# Altium PCB somiqboard.PcbDoc (part 4 of 10)
Units mm, origin at the board's own origin, x right, y up, seen from the top; angles counter-clockwise.
Board outline 110 x 96 mm, 4 copper layers (Top Layer, Ground_Plane, Power_Plane, Bottom Layer), stack 1.454 mm thick; 221 components, 356 nets, 1185 pads, 539 vias.
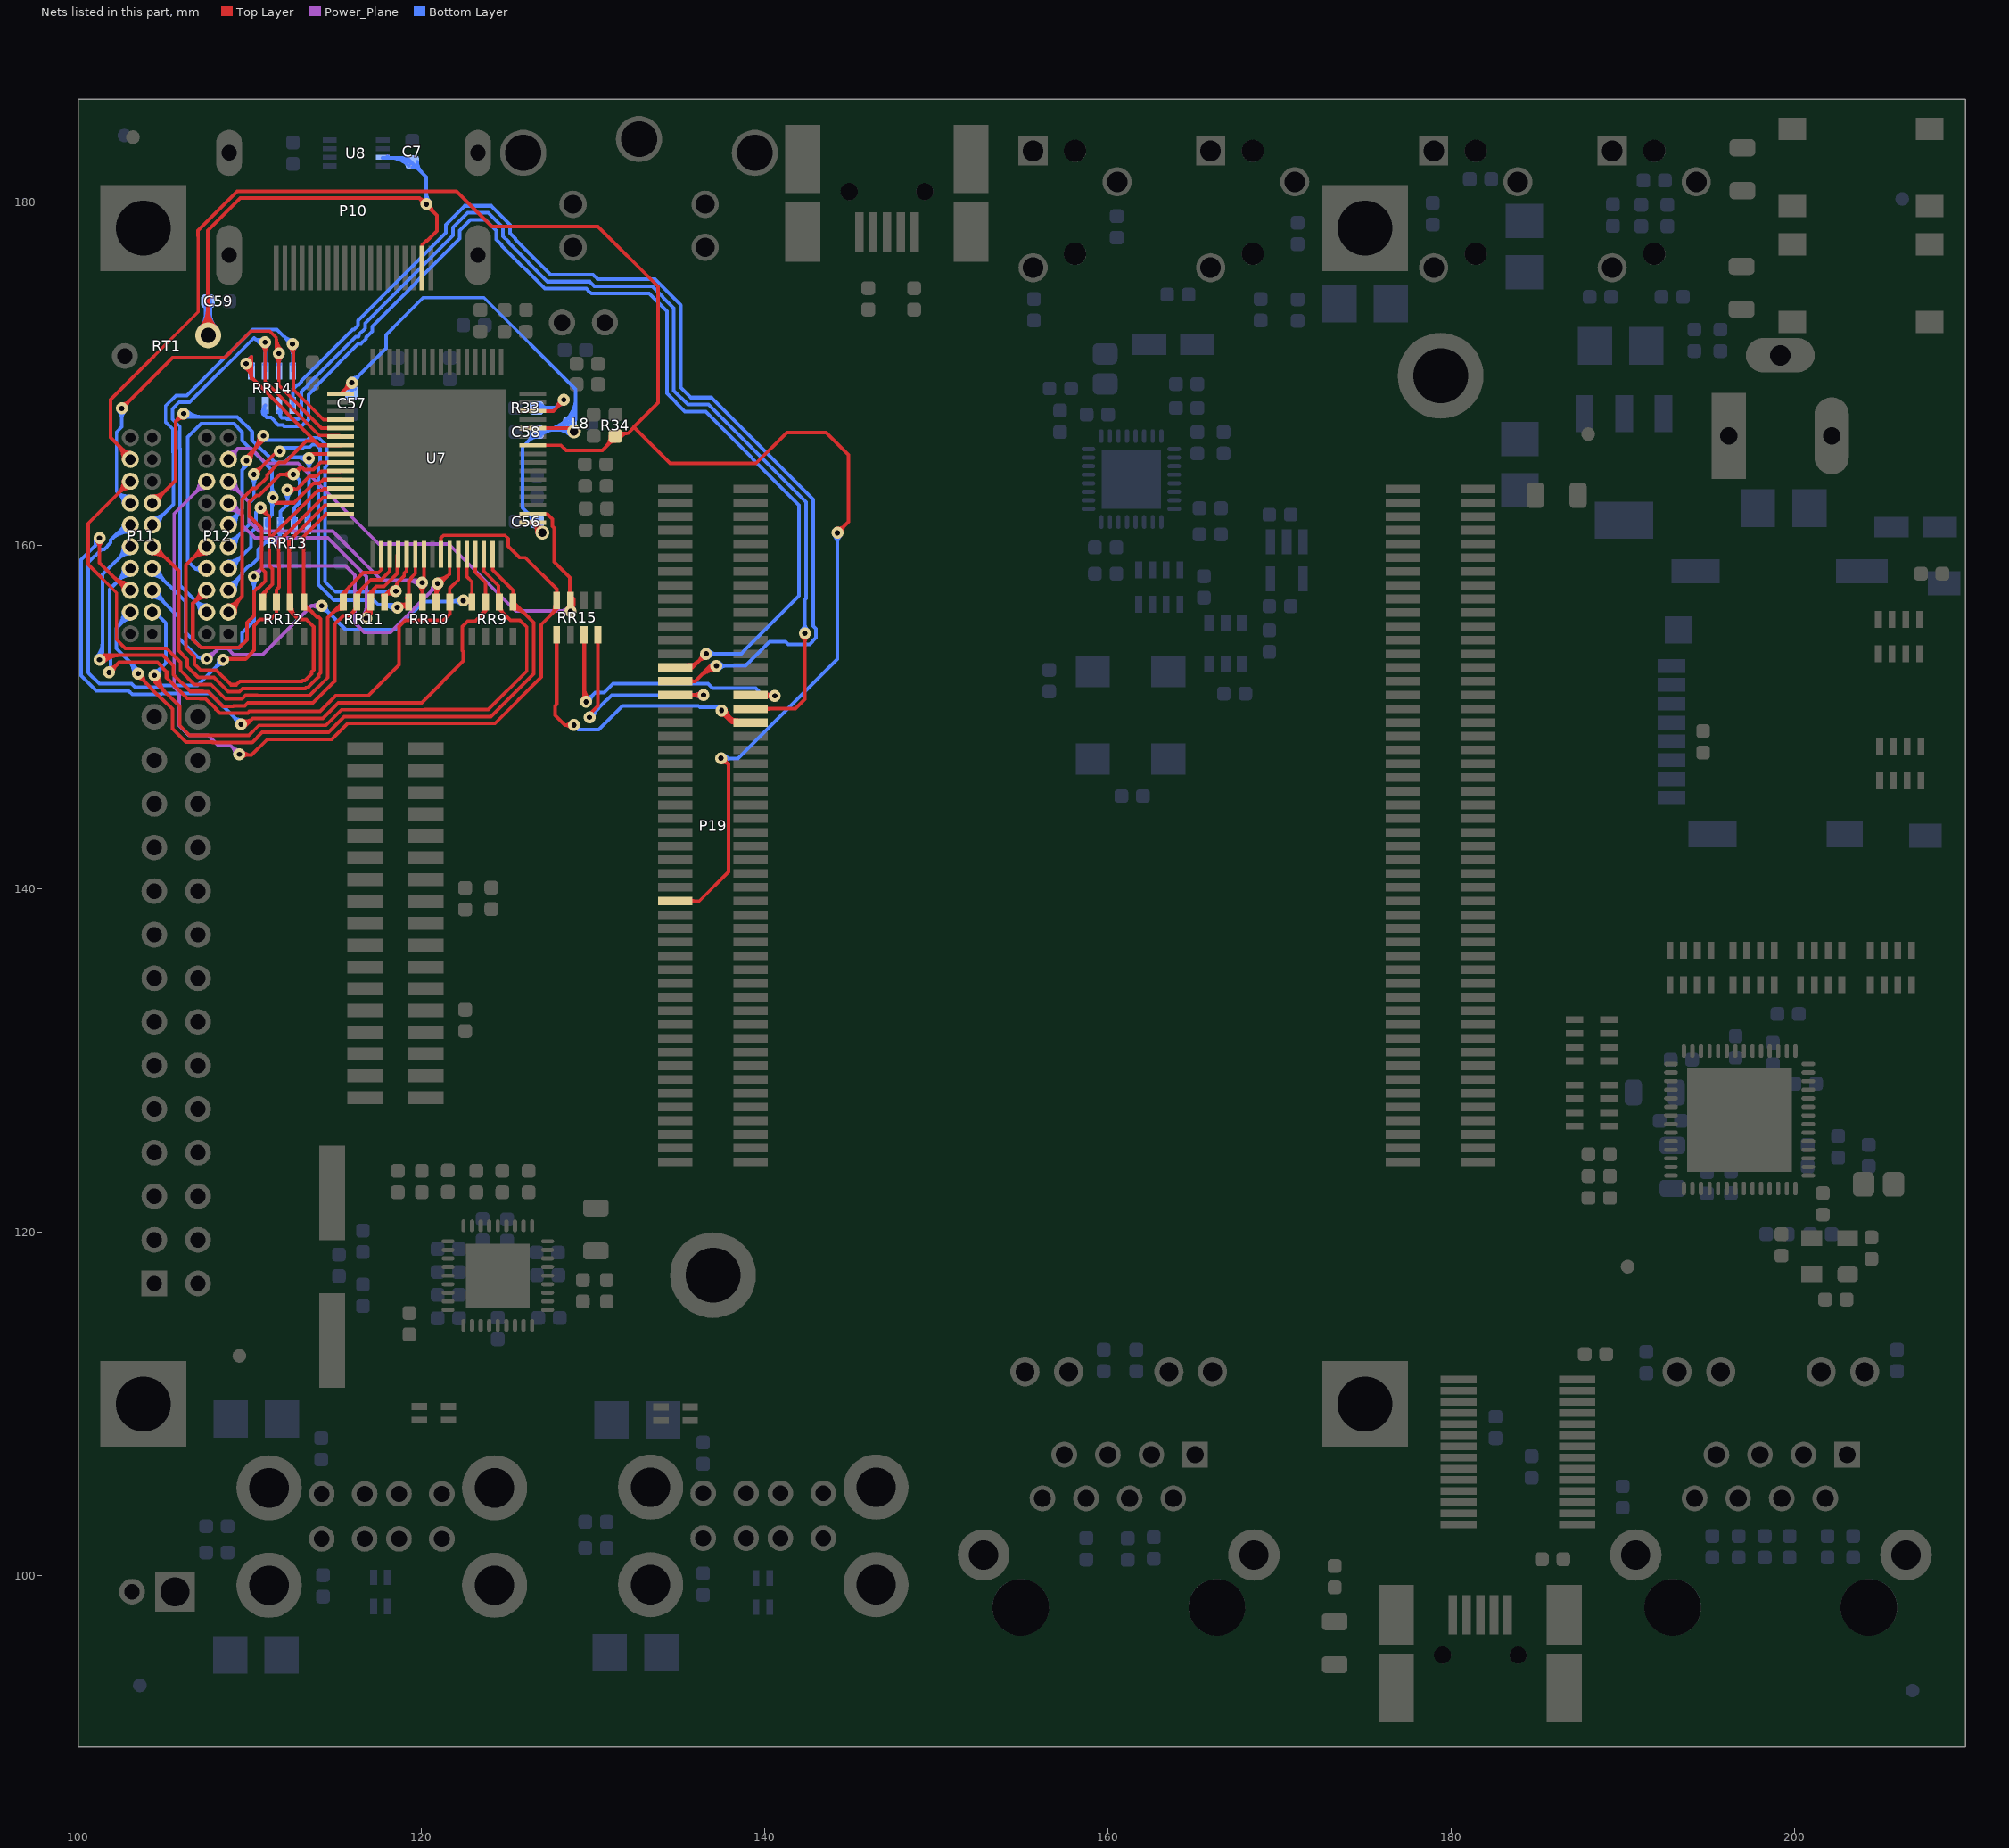
[diagram p6: the nets of this part, all layers, seen from the top]

## Via types
v1: diameter 0.7/0.7/0.7/0.7 (per signal layer), hole 0.3, Top Layer to Bottom Layer, tented both sides, 270 vias
v2: diameter 0.8, hole 0.3, Top Layer to Bottom Layer, tented both sides, 49 vias
v3: diameter 0.6/0.7/0.7/0.6 (per signal layer), hole 0.3, Top Layer to Bottom Layer, tented both sides, 47 vias
v4: diameter 0.6, hole 0.3, Top Layer to Bottom Layer, tented both sides, 43 vias
v5: diameter 1.1/1.1/1.1/1.1 (per signal layer), hole 0.6, Top Layer to Bottom Layer, tented both sides, 32 vias
v6: diameter 0.8/0.8/0.8/0.8 (per signal layer), hole 0.4, Top Layer to Bottom Layer, tented both sides, 31 vias
v7: diameter 0.9/0.9/0.9/0.9 (per signal layer), hole 0.5, Top Layer to Bottom Layer, tented both sides, 29 vias
v8: diameter 1.5/1.5/1.5/1.5 (per signal layer), hole 0.9, Top Layer to Bottom Layer, tented both sides, 14 vias
v9: diameter 1.2/1.2/1.2/1.2 (per signal layer), hole 0.6, Top Layer to Bottom Layer, tented both sides, 10 vias
v10: diameter 0.8/0.8/0.8/0.8 (per signal layer), hole 0.5, Top Layer to Bottom Layer, tented both sides, 6 vias
v11: diameter 1/1/1/1 (per signal layer), hole 0.5, Top Layer to Bottom Layer, tented both sides, 3 vias
v12: diameter 0.8/0.8/0.8/0.8 (per signal layer), hole 0.8, Top Layer to Bottom Layer, tented both sides, 2 vias
v13: diameter 1.2/1.2/1.2/1.2 (per signal layer), hole 1.2, Top Layer to Bottom Layer, tented both sides, 2 vias
v14: diameter 0.6/0.6/0.6/0.6 (per signal layer), hole 0.3, Top Layer to Bottom Layer, tented both sides, 1 vias

## Nets (pads, with @x,y where several pads share a name; then routed paths per layer and width w, separated by ;. In a path a pad name is that pad's centre, name@x,y a point inside that pad or via, vN(x,y) a via of type N, cw(c..) or ccw(c..) an arc to the next point about the centre after c; other vN are vias at no path point) (continued)
DSS_DATA21: P19.28 RR14.7 | length 66.4
  Top Layer w0.21: P19.28@134.8,152.9 135.8,152.9 v1(136.6,153.7) ; P19.28@135.55,152.835 ccw(c135.55,153.282) 135.866,152.966 ; P19.28@135.55,153.045 ccw(c135.55,153.999) 136.224,153.324 ; v1@136.355,153.7 cw(c135.764,153.7) 136.182,153.282 cw(c136.6,152.864) v1@136.6,153.455
  Bottom Layer w0.21: RR14.7@110.825,167.958 ccw(c111.004,167.792) 110.831,167.619 ; RR14.7@110.909,168.18 110.85,168.121 110.85,167.6 110.985,167.465 ; RR14.7@110.979,167.815 ccw(c111.164,167.644) 110.985,167.465 ; v1(136.6,153.7) 138.65,153.7 138.85,153.9 ; v1@136.773,153.527 cw(c137.191,153.109) 137.191,153.7 cw(c137.191,154.291) v1@136.773,153.873 ; 138.838,153.912 142,157.074 142,158.02 142.015,158.035 142.015,162.365 136.57,167.81 135.37,167.81 134.31,168.87 134.31,173.67 133.28,174.7 129.92,174.7 129.86,174.76 129.83,174.76 129.615,174.975 127.193,174.975 124.678,177.49 124.678,177.522 124.358,177.842 124.358,178.364 123.74,178.982 122.866,178.982 122.248,178.364 122.248,177.898 117.135,172.785 117.135,172.487 116.785,172.138 116.785,172.053 116.507,171.775 116.345,171.775 113.834,169.264 113.834,169.214 113.424,168.804 113.424,167.354 113.325,167.255 113.295,167.255 113.005,166.965 112.013,166.965 111.936,167.042 111.664,167.042 111.241,167.465 110.985,167.465
DSS_DATA22: P19.33 RR14.6 | length 65.4
  Top Layer w0.21: P19.33@139.25,150.5 141.8,150.5 142.35,151.05 v1(142.35,154.9) ; P19.33@140.053,150.397 cw(c140.3,150.15) 140.3,150.5 cw(c140.3,150.85) P19.33@140.053,150.603 ; v1@142.177,154.727 cw(c141.759,154.309) 142.35,154.309 cw(c142.941,154.309) v1@142.523,154.727
  Bottom Layer w0.21: RR14.6@111.655,167.802 cw(c111.458,167.518) 111.804,167.518 ; RR14.6@111.709,168.18 111.804,168.085 111.804,167.53 111.882,167.452 112.106,167.452 112.183,167.375 112.835,167.375 113.014,167.554 113.014,168.974 113.424,169.384 113.424,169.434 116.175,172.185 116.338,172.185 116.375,172.222 116.375,172.307 116.725,172.657 116.725,172.955 121.838,178.067 121.838,178.534 122.696,179.392 123.909,179.392 124.768,178.534 124.768,178.032 125.088,177.712 125.088,177.66 127.362,175.385 129.815,175.385 130.09,175.11 133.45,175.11 134.72,173.84 134.72,169.04 135.54,168.22 136.74,168.22 142.425,162.535 142.425,156.919 142.35,156.844 v1(142.35,154.9) ; v1@142.177,155.073 ccw(c141.759,155.491) 142.35,155.491 ccw(c142.941,155.491) v1@142.523,155.073
DSS_DATA23: P19.30 RR14.5 | length 68.6
  Top Layer w0.21: P19.30@134.745,152.045 P19.30@134.8,152.1 135.95,152.1 136.85,153 v1(137.2,153) ; P19.30@135.653,151.997 cw(c135.9,151.75) 135.9,152.1 cw(c135.9,152.45) P19.30@135.653,152.203 ; 136.184,152.334 cw(c137.2,151.318) v1@137.2,152.755 ; 136.542,152.692 cw(c137.2,152.035) v1@137.2,152.965
  Bottom Layer w0.21: RR14.5@112.442,168.547 ccw(c112.253,168.736) 112.52,168.736 ; RR14.5@112.509,168.18 112.509,167.995 112.52,168.006 112.52,169.109 112.786,169.375 112.835,169.375 113.014,169.554 113.014,169.603 116.006,172.595 116.083,172.595 116.315,172.827 116.315,173.124 121.428,178.237 121.428,178.704 122.526,179.802 124.079,179.802 125.178,178.704 125.178,178.202 125.498,177.882 125.498,177.83 127.532,175.795 130.005,175.795 130.28,175.52 133.619,175.52 135.13,174.009 135.13,169.209 135.709,168.63 136.909,168.63 142.85,162.689 142.85,155.326 143.005,155.171 143.005,154.629 142.621,154.245 141.381,154.245 141.221,154.405 140.305,154.405 138.9,153 v1(137.2,153) 137.05,153 136.95,153.1 v1@137.2,153.1 ; 112.52,168.683 ccw(c112.712,168.683) RR14.5@112.576,168.547 ; v1@137.373,152.826 cw(c137.791,152.408) 137.791,153 cw(c137.791,153.591) v1@137.373,153.173
DSS_HSYNC: P19.31 RR15.3 | length 22.2
  Top Layer w0.21: RR15.3@129.422,154.446 cw(c129.233,154.257) 129.5,154.257 ; v1@129.427,151.073 ccw(c129.25,151.25) 129.5,151.25 ; RR15.3@129.489,154.75 RR15.3@129.489,154.813 ; 129.5,151.733 ccw(c130.433,151.733) v1@129.773,151.073 ; 129.5,154.31 cw(c129.692,154.31) RR15.3@129.556,154.446 ; RR15.3@129.5,154.75 129.5,151 v1(129.6,150.9) ; P19.31@139.2,151.3 v1@140.6,151.3 ; P19.31@139.887,151.3 cw(c139.887,150.537) v1@140.426,151.076 ; P19.31@140.053,151.197 cw(c140.3,150.95) 140.3,151.3 cw(c140.3,151.65) P19.31@140.053,151.403 ; P19.31@140.13,151.3 ccw(c140.13,151.72) v1@140.426,151.423 ; v1@140.373,151.158 ccw(c140.096,151.046) 140.174,151.334 ccw(c140.234,151.561) v1@140.413,151.409
  Bottom Layer w0.21: v1(129.6,150.9) 130.134,151.434 130.659,151.434 131.18,151.955 136.721,151.955 136.976,151.7 139.48,151.7 139.88,151.3 v1@140.6,151.3 ; v1@129.6,151.145 ccw(c129.6,151.736) 130.018,151.318 ccw(c130.436,150.9) v1@129.845,150.9 ; 139.887,151.3 cw(c139.887,150.537) v1@140.426,151.076 ; 140.13,151.3 ccw(c140.13,151.72) v1@140.426,151.423
  other v1: 140.6,151.25
DSS_PCLK: P19.35 RR15.1 | length 22.7
  Top Layer w0.21: RR15.1@127.822,154.446 cw(c127.66,154.284) 127.889,154.284 cw(c128.118,154.284) RR15.1@127.956,154.446 ; RR15.1@127.889,154.813 127.889,150.765 127.795,150.671 127.795,150.128 128.373,149.55 ; v1@128.713,149.392 ccw(c128.373,149.106) 128.373,149.55 ; v1@128.713,149.708 cw(c128.373,149.994) 128.373,149.55 ; v1(128.9,149.55) 128.373,149.55 ; v1@137.45,150.35 138.099,149.7 ; v1@137.5,150.155 cw(c137.5,149.805) 137.747,150.052 ; v1@137.534,150.409 ccw(c138.019,150.535) 137.768,150.101 ; v1@137.604,150.195 ccw(c138.45,151.041) P19.35@138.45,149.845 ; v1@137.737,150.461 ccw(c138.701,150.712) P19.35@138.203,149.85 ; v1@137.745,150.4 ccw(c138.578,150.4) 137.989,149.811 ; 137.963,149.837 ccw(c138.45,150.324) P19.35@138.45,149.635 ; P19.35@138.347,149.597 ccw(c138.1,149.35) 138.1,149.7 ; P19.35@138.347,149.803 cw(c138.1,150.05) 138.1,149.7 ; P19.35@139.2,149.7 138.099,149.7
  Bottom Layer w0.21: v1(128.9,149.55) 129.155,149.295 130.345,149.295 131.1,150.05 131.725,150.675 136.149,150.675 136.179,150.645 136.205,150.645 136.25,150.6 137.35,150.6 v1@137.5,150.45
  other v1: 137.5,150.4
DSS_VSYNC: P19.32 RR15.4 | length 18
  Top Layer w0.21: v1(129.8,150) 129.75,149.95 129.7,150 129.7,150.073 130.289,150.663 RR15.4@130.289,154.813 ; RR15.4@130.222,154.446 cw(c130.06,154.284) 130.289,154.284 cw(c130.518,154.284) RR15.4@130.356,154.446 ; P19.32@134.8,151.3 v1(136.45,151.3) ; P19.32@135.653,151.197 cw(c135.9,150.95) 135.9,151.3 cw(c135.9,151.65) P19.32@135.653,151.403 ; v1@136.277,151.127 ccw(c135.859,150.709) 135.859,151.3 ccw(c135.859,151.891) v1@136.277,151.473
  Bottom Layer w0.21: v1(129.8,150) 129.75,149.95 129.7,150 129.7,150.073 129.873,150.073 130.824,151.024 130.828,151.024 131.104,151.3 v1(136.45,151.3) ; v1@129.8,150.245 ccw(c129.8,150.836) 130.218,150.418 ccw(c130.636,150) v1@130.045,150 ; v1@136.277,151.127 ccw(c135.859,150.709) 135.859,151.3 ccw(c135.859,151.891) v1@136.277,151.473
DVI_+5V: C7.2 C59.1 P10.18 RT1.2 U8.7 | length 42.7
  Top Layer w0.21: RT1.2@107.127,172.709 ccw(c106.105,173.731) 107.55,173.731 ; RT1.2@107.275,172.561 ccw(c106.612,173.224) 107.55,173.224 ; RT1.2@107.55,172.15 107.55,178.35 109.45,180.25 119.9,180.25 ; 107.55,173.383 ccw(c108.713,173.383) RT1.2@107.891,172.561 ; 107.55,173.89 ccw(c109.22,173.89) RT1.2@108.039,172.709 ; 119.917,180.233 cw(c119.584,179.9) v1@120.055,179.9 ; P10.18@120.053,176.167 120.053,177.539 120.286,177.772 120.352,177.772 120.905,178.325 120.905,179.245 119.9,180.25 ; v1@120.254,180.141 cw(c120.181,180.531) 119.9,180.25 ; v1@120.3,179.655 cw(c120.3,179.184) 120.633,179.517 ; v1@120.545,179.9 ccw(c121.257,179.9) 120.754,179.396
  Bottom Layer w0.21: U8.7@117.755,182.6 119.175,182.6 120.3,181.475 v1(120.3,179.9) ; U8.7@118.037,182.662 ccw(c118.186,182.811) 118.186,182.6 ; 118.159,182.6 cw(c118.159,181.034) C7.2@119.266,182.141 ; 118.666,182.6 cw(c118.666,181.541) C7.2@119.415,182.29 ; C7.2@119.475,182.055 cw(c119.475,181.464) 119.893,181.882 ; C7.2@119.77,182.35 ccw(c120.603,182.35) 120.014,181.761 ; v1@120.127,180.073 ccw(c119.709,180.491) 120.3,180.491 ccw(c120.891,180.491) v1@120.473,180.073
  Bottom Layer w0.5: RT1.2@107.229,172.607 ccw(c106.409,173.427) 107.569,173.427 ; RT1.2@107.569,172.331 C59.1@107.569,174.244 ; 107.569,173.494 ccw(c108.824,173.494) RT1.2@107.936,172.607
DVI_CLK+: P12.16 RR15.8 U7.57 | length 58
  Top Layer w0.2: v1(109.4,147.85) v1@109.5,147.85 ; v1@109.5,147.95 109.65,147.8 110.1,147.8 ; v1@109.577,147.673 cw(c109.883,147.367) 109.883,147.8 ; v1@109.581,148.022 ccw(c110.1,148.517) 110.1,147.8 ; U7.57@121.154,159.5 121.154,160.454 121.3,160.6 124.878,160.6 125.079,160.399 125.079,159.971 125.75,159.3 126.073,159.3 127.9,157.473 127.9,156.319 126.989,155.408 126.989,154.023 ; 127,154.012 127,152.35 124.29,149.64 120.535,149.64 120.53,149.635 115.683,149.635 114.773,148.725 111.025,148.725 110.1,147.8 ; 127.574,155.993 ccw(c127.053,156.513) RR15.8@127.789,156.513 ; RR15.8@127.818,157.184 ccw(c127.621,157.381) 127.9,157.381 ; 127.9,157.328 ccw(c128.104,157.328) RR15.8@127.96,157.184
  Power_Plane w0.2: 105.65,151.7 105.6,151.75 105.6,161.861 P12.16@107.493,163.754 ; 105.661,151.711 105.895,151.477 105.895,149.521 106.466,148.95 107.584,148.95 108.184,148.35 108.9,148.35 v1(109.4,147.85) ; P12.16@107.093,163.754 cw(c106.127,163.754) 106.81,163.071 cw(c107.493,162.388) P12.16@107.493,163.354 ; v1@109.15,147.85 ccw(c108.546,147.85) 108.973,148.277 ccw(c109.4,148.704) v1@109.4,148.1
DVI_DATA0: P11.4 RR9.1 U7.63 | length 44.8
  Top Layer w0.2: U7.63@124.154,159.5 124.154,158.596 125.35,157.4 RR9.1@125.35,157.2 ; RR9.1@125.278,157.089 ccw(c125.105,157.262) 125.35,157.262 ; 125.35,157.257 ccw(c125.588,157.257) RR9.1@125.42,157.089
  Top Layer w0.21: v1@103.5,152.305 cw(c103.5,151.955) 103.748,152.202 ; v1(103.5,152.55) 103.5,152.45 104.857,151.093 104.882,151.093 105.5,150.475 105.5,149.601 105.5,149.35 106.297,148.553 106.548,148.553 107.422,148.553 107.425,148.55 107.85,148.55 ; v1@103.745,152.55 ccw(c104.578,152.55) 103.989,151.961 ; 107.85,148.545 110.087,148.545 ; 110.087,148.545 110.145,148.545 110.73,149.13 114.605,149.13 115.515,150.04 120.362,150.04 120.367,150.045 124.068,150.045 126.555,152.532 126.555,154.95 ; RR9.1@125.349,156.323 cw(c125.349,155.369) 126.023,156.044 ; RR9.1@125.349,156.533 cw(c125.349,156.086) 125.665,156.402 ; RR9.1@125.349,156.718 126.55,155.517 126.55,154.95
  Bottom Layer w0.21: 102.281,155.235 ccw(c101.382,156.134) P11.4@102.653,156.134 ; 102.598,155.553 cw(c103.048,155.103) P11.4@103.048,155.739 ; 102.639,155.594 ccw(c102.099,156.134) P11.4@102.863,156.134 ; 102.94,153.31 cw(c102.181,152.55) v1@103.255,152.55 ; P11.4@103,156.15 103,155.954 102.243,155.197 102.243,154.007 103.5,152.75 v1(103.5,152.55) ; 103.299,152.951 cw(c102.898,152.55) v1@103.465,152.55
DVI_DATA1: P11.3 RR9.2 U7.62 | length 42
  Top Layer w0.2: v1@104.377,152.211 cw(c104.327,152.045) 104.5,152.045 cw(c104.76,152.045) v1@104.602,152.251 ; v1(104.45,152.45) 104.447,152.45 104.428,152.469 104.428,152.478 104.486,152.536 104.5,152.522 104.5,152.048 105.914,150.634 105.914,149.536 106.492,148.958 109.222,148.958 109.231,148.95 109.769,148.95 ; v1@104.5,152.45 ccw(c105.47,152.45) 104.784,151.764 ; v1@104.7,152.45 ccw(c106.153,152.45) 105.125,151.422 ; 109.769,148.95 109.95,148.95 110.535,149.535 114.438,149.535 115.348,150.445 120.194,150.445 120.199,150.45 123.9,150.45 126.15,152.7 126.15,154.777 126.145,154.782 126.145,155.255 125.75,155.65 125.2,155.65 124.549,156.301 RR9.2@124.549,156.718 ; U7.62@123.654,159.5 123.654,158.512 124.5,157.666 RR9.2@124.5,157.05 ; 124.5,157.378 ccw(c124.909,157.378) RR9.2@124.62,157.089 ; RR9.2@124.649,156.418 ccw(c125.173,156.418) 124.802,156.048
  Bottom Layer w0.2: P11.3@104.318,156.134 104.472,156.134 105.118,155.488 105.118,153.168 104.428,152.478 104.428,152.469 104.447,152.45 v1(104.45,152.45) ; v1@104.45,152.7 ccw(c104.45,153.182) 104.791,152.841 ; v1@104.7,152.45 cw(c105.424,152.45) 104.912,152.962
DVI_DATA2: P11.6 RR9.3 U7.61 | length 50
  Top Layer w0.2: U7.61@123.154,159.5 123.154,158.446 123.75,157.85 RR9.3@123.75,157.1 ; RR9.3@123.678,157.089 ccw(c123.505,157.262) 123.75,157.262 ; 123.75,157.257 ccw(c123.988,157.257) RR9.3@123.82,157.089
  Top Layer w0.21: v1@101.077,160.277 cw(c100.659,159.859) 101.25,159.859 cw(c101.841,159.859) v1@101.423,160.277 ; v1(101.25,160.45) 101.25,159 102.8,157.45 P11.6@103,157.45 ; 102.029,158.221 ccw(c103.048,159.24) P11.6@103.048,157.799 ; 102.387,157.863 ccw(c103.048,158.523) P11.6@103.048,157.589 ; 102.517,157.733 cw(c102.187,157.404) P11.6@102.653,157.404 ; v1@109.514,149.632 ccw(c109.677,150.014) 109.97,149.72 ; v1@109.596,149.825 ccw(c109.808,150.322) 110.19,149.94 ; v1@109.7,149.45 110.19,149.94 ; 122.4,153.876 122.4,155.3 122.7,155.6 123.15,155.6 123.749,156.199 ; 122.455,153.821 122.455,153.278 120.026,150.85 115.18,150.85 114.27,149.94 110.19,149.94 ; 123.432,155.882 ccw(c122.896,156.418) RR9.3@123.654,156.418 ; RR9.3@123.684,156.349 cw(c123.544,156.199) 123.749,156.199 ; RR9.3@123.749,156.718 123.749,156.199 ; RR9.3@123.814,156.349 ccw(c123.954,156.199) 123.749,156.199
  Bottom Layer w0.21: v1@101,160.3 101,160.006 100.185,159.191 100.185,152.435 101.065,151.555 102.063,151.555 102.937,151.555 102.991,151.5 103,151.5 ; 102.996,151.496 103.158,151.333 104.841,151.333 ; 104.908,151.4 107.7,151.4 v1@109.35,149.75 ; 109.081,150.019 cw(c108.662,149.6) v1@109.255,149.6 ; 109.082,150.018 ccw(c109.5,150.435) v1@109.5,149.845
  other v1: 109.5,149.6
DVI_DATA3: P11.5 RR9.4 U7.60 | length 33.6
  Top Layer w0.2: U7.60@122.654,159.5 122.654,158.196 122.95,157.9 122.95,157.25 ; RR9.4@122.878,157.089 ccw(c122.705,157.262) 122.95,157.262 ; RR9.4@122.881,157.091 ccw(c122.733,157.25) 122.95,157.25 ; 122.95,157.257 ccw(c123.188,157.257) RR9.4@123.02,157.089 ; RR9.4@123.018,157.09 cw(c123.171,157.25) 122.95,157.25
  Top Layer w0.21: v1(107.5,153.4) v1@107.549,153.4 ; v1(122.45,156.8) RR9.4@122.867,156.8 ; v1@122.522,156.8 cw(c122.522,156.291) RR9.4@122.882,156.651 ; v1@122.664,156.681 cw(c122.867,156.568) RR9.4@122.867,156.8 ; v1@122.664,156.919 ccw(c122.867,157.032) RR9.4@122.867,156.8 ; RR9.4@122.949,156.718 RR9.4@122.867,156.8
  Power_Plane w0.21: v1@107.5,153.645 ccw(c107.5,154.414) 108.044,153.87 ; v1@107.55,153.4 107.573,153.4 108.179,154.005 108.721,154.005 109.076,153.65 110.75,153.65 113.6,156.5 v1(114.2,156.5) ; v1@107.745,153.4 cw(c108.159,153.4) 107.866,153.692 ; v1@114.027,156.327 ccw(c113.609,155.909) 113.609,156.5 ccw(c113.609,157.091) v1@114.027,156.673
  Bottom Layer w0.21: P11.5@104.318,157.009 cw(c104.318,156.055) 104.992,156.73 cw(c105.667,157.404) P11.5@104.713,157.404 ; P11.5@104.318,157.404 105.85,155.872 105.85,154.65 107,153.5 ; 107.15,153.5 ccw(c107.15,153.75) v1@107.327,153.573 ; v1@107.271,153.313 ccw(c107,153.21) 107,153.5 ; v1(107.5,153.4) 107.4,153.5 107,153.5 ; v1@114.2,156.255 cw(c114.2,155.664) 114.618,156.082 cw(c115.036,156.5) v1@114.445,156.5 ; v1(114.2,156.5) 115.6,155.1 118.5,155.1 119.127,155.727 120.15,156.75 v1@122.4,156.75 ; 121.738,156.75 ccw(c121.738,157.512) v1@122.277,156.973 ; 121.979,156.75 cw(c121.979,156.329) v1@122.277,156.627
DVI_DATA4: P11.8 RR10.1 U7.59 | length 38.5
  Top Layer w0.2: RR10.1@121.595,157.089 ccw(c121.463,157.221) 121.65,157.221 ; RR10.1@121.65,156.95 121.65,157.5 122.154,158.004 U7.59@122.154,159.5 ; 121.65,157.298 ccw(c121.946,157.298) RR10.1@121.737,157.089
  Top Layer w0.21: v1@101.8,152.865 ccw(c101.8,153.504) 102.252,153.052 ; v1@101.85,152.65 102.4,153.2 103.224,153.2 103.229,153.205 104.621,153.205 105.155,152.671 105.155,152.315 106.37,151.1 107.1,151.1 107.107,151.093 107.422,151.093 108.04,150.475 108.04,150.455 108.255,150.24 109.214,150.24 109.228,150.255 109.886,150.255 109.981,150.35 114.1,150.35 115.01,151.26 116.91,151.26 118.695,153.045 118.695,155.278 119.067,155.65 121.3,155.65 121.666,156.016 RR10.1@121.666,156.718 ; v1@102.045,152.62 cw(c102.589,152.62) 102.204,153.004 ; RR10.1@121.599,156.351 cw(c121.437,156.189) 121.666,156.189 cw(c121.895,156.189) RR10.1@121.733,156.351
  Bottom Layer w0.21: v1@101.8,152.6 101.905,152.705 101.905,153.621 101.833,153.693 101.833,157.459 P11.8@103.048,158.674 ; P11.8@102.653,158.674 cw(c101.699,158.674) 102.374,158 cw(c103.048,157.325) P11.8@103.048,158.279
  other v1: 101.8,152.62
DVI_DATA5: P11.7 RR10.2 U7.58 | length 38.1
  Top Layer w0.2: v1@120.95,157.85 ccw(c120.95,158.333) 121.291,157.991 ; v1@120.95,158.05 ccw(c120.95,159.016) 121.633,158.333 ; v1@121.15,157.85 121.654,158.354 U7.58@121.654,159.5 ; v1@121.2,157.8 cw(c121.441,157.8) 121.271,157.971
  Top Layer w0.21: v1@120.777,157.627 cw(c120.561,157.411) 120.866,157.411 ; RR10.2@120.799,157.085 ccw(c120.637,157.247) 120.866,157.247 ccw(c121.095,157.247) RR10.2@120.933,157.085 ; RR10.2@120.866,156.718 120.866,157.716 v1(120.95,157.8) ; RR10.2@120.866,157.006 cw(c121.744,157.006) v1@121.123,157.627
  Power_Plane w0.21: v1(110.25,158.2) 110.15,158.1 110.15,158.2 110.2,158.2 110.821,158.821 115.587,158.821 116.129,158.28 116.129,155.497 116.676,154.95 118.2,154.95 120.95,157.7 v1(120.95,157.8) ; v1@110.25,158.445 ccw(c110.25,158.915) 110.583,158.583 ; v1@110.495,158.2 cw(c111.207,158.2) 110.703,158.703 ; 120.461,157.211 ccw(c119.872,157.8) v1@120.705,157.8 ; 120.702,157.452 cw(c120.95,157.205) v1@120.95,157.555
  Bottom Layer w0.2: 109.38,154.05 109.43,154.1 109.445,154.1
  Bottom Layer w0.21: P11.7@104.318,158.279 cw(c104.318,157.325) 104.992,158 cw(c105.667,158.674) P11.7@104.713,158.674 ; P11.7@104.318,158.674 106.26,156.732 106.26,154.959 107.16,154.059 108.555,154.059 108.564,154.05 109.38,154.05 ; 109.465,154.135 109.568,154.238 109.568,154.936 110.25,155.618 v1(110.25,158.2) ; v1@110.077,158.026 cw(c109.658,157.608) 110.25,157.608 cw(c110.841,157.608) v1@110.423,158.026
DVI_DATA6: P12.15 RR10.3 U7.55 | length 21.4
  Top Layer w0.2: v1@119.873,157.673 cw(c119.407,157.207) RR10.3@120.066,157.207 ; RR10.3@119.995,157.089 ccw(c119.825,157.259) 120.066,157.259 ccw(c120.307,157.259) RR10.3@120.137,157.089 ; RR10.3@120.05,156.65 RR10.3@120.05,156.718 ; RR10.3@120.066,156.718 v1@120.066,157.766 ; 120.066,157.285 cw(c120.614,157.285) v1@120.227,157.673 ; v1@120.154,158.004 U7.55@120.154,159.5
  Power_Plane w0.2: P12.15@108.763,163.354 cw(c108.763,162.388) 109.446,163.071 cw(c110.129,163.754) P12.15@109.163,163.754 ; P12.15@108.763,163.754 109.983,162.534 109.983,161.417 ; 110,161.4 110.545,160.855 114.826,160.855 117.681,158 118.244,158 118.247,158.003 118.785,158.003 118.788,158 120,158 v1@120.15,157.85 ; 119.083,158 cw(c119.083,156.883) v1@119.873,157.673 ; 119.566,158 cw(c119.566,157.366) v1@120.014,157.814 ; v1(120.05,157.85) v1@120.15,157.85 ; v1@120.2,157.85 v1@120.15,157.85
DVI_DATA7: P12.9 RR10.4 U7.54 | length 34.1
  Top Layer w0.2: v1@110.1,164 v1(110.25,164.15) 111.6,165.5 v1(111.75,165.5) ; v1@110.25,164.4 ccw(c110.25,165.004) 110.677,164.577 ccw(c111.104,164.15) v1@110.5,164.15 ; v1(118.606,156.4) 118.656,156.45 118.998,156.45 ; v1@118.628,156.445 ccw(c118.795,156.791) RR10.4@119.067,156.519 ; v1@118.715,156.625 ccw(c118.925,157.059) RR10.4@119.266,156.718 118.998,156.45 ; v1@118.808,156.547 ccw(c118.998,156.685) 118.998,156.45 ; v1@118.847,156.335 cw(c118.998,156.294) 118.998,156.45 ; v1@118.947,156.45 cw(c118.947,156.099) RR10.4@119.195,156.347 ; RR10.4@119.15,156.95 119.279,157.079 119.279,157.938 119.4,158.059 119.4,158.119 119.654,158.373 U7.54@119.654,159.5 ; RR10.4@119.187,156.357 ccw(c118.998,156.212) 118.998,156.45 ; RR10.4@119.195,157.089 ccw(c118.993,157.291) 119.279,157.291 ; 119.279,157.228 ccw(c119.476,157.228) RR10.4@119.337,157.089
  Bottom Layer w0.2: P12.9@108.7,159.95 109.963,161.213 109.963,162.462 110.25,162.749 v1(110.25,164.15) ; P12.9@108.763,160.344 ccw(c108.763,161.143) 109.328,160.578 ; P12.9@108.963,159.944 cw(c109.612,159.944) 109.153,160.403 ; P12.9@109.163,159.944 cw(c110.295,159.944) 109.495,160.745 ; v1@110.073,163.973 cw(c109.646,163.546) 110.25,163.546 cw(c110.854,163.546) v1@110.427,163.973 ; v1(111.75,165.5) 111.75,165.6 111.85,165.7 113.131,165.7 113.181,165.75 113.508,165.75 113.649,165.891 113.868,165.891 114.1,165.659 114.1,164.83 114,164.731 114,157.734 114.906,156.828 117.223,156.828 117.496,156.555 118.451,156.555 v1(118.606,156.4) ; 117.627,156.555 cw(c117.627,155.421) v1@118.429,156.223 ; 118.11,156.555 cw(c118.11,155.904) v1@118.571,156.364
DVI_DATA8: P12.11 RR11.1 U7.53 | length 34.2
  Top Layer w0.2: v1(109.813,164.954) 109.813,165.163 110.8,166.15 v1(110.8,166.4) ; v1@109.863,164.954 cw(c110.488,164.954) 110.046,165.396 ; v1@110.063,164.954 cw(c111.171,164.954) 110.388,165.738 ; 110.196,165.546 ccw(c109.343,166.4) v1@110.55,166.4 ; 110.538,165.888 ccw(c110.026,166.4) v1@110.75,166.4 ; RR11.1@117.75,157.1 RR11.1@117.875,157.1 ; RR11.1@117.956,157.018 cw(c118.349,157.018) 118.071,157.296 ; 118.046,157.271 cw(c118.292,157.025) v1@118.488,157.312 ; v1@118.322,157.547 RR11.1@117.875,157.1 ; v1@118.375,157.147 ccw(c118.153,156.822) RR11.1@117.875,157.1 ; v1@118.43,157.588 ccw(c118.349,157.812) 118.587,157.812 ; v1@118.587,157.387 118.587,157.812 ; 118.587,157.785 ccw(c118.948,157.785) v1@118.693,157.53 ; U7.53@119.154,159.5 119.154,158.544 119,158.39 119,158.225 118.587,157.812
  Bottom Layer w0.2: P12.11@108.75,161.15 108.75,161.34 109.563,162.153 109.563,164.413 ; P12.11@108.763,161.614 ccw(c108.763,162.245) 109.209,161.799 ; P12.11@108.963,161.214 cw(c109.781,161.214) 109.202,161.792 ; P12.11@109.163,161.214 cw(c110.463,161.214) 109.544,162.133 ; v1@109.604,164.817 cw(c109.336,164.64) 109.563,164.413 ; 109.737,164.587 ccw(c109.545,164.778) v1@109.771,164.927 ; v1@109.767,165 v1(109.813,164.954) 109.813,164.663 109.563,164.413 ; v1@110.8,166.15 113.343,166.15 113.484,166.291 114.034,166.291 114.5,165.825 114.5,164.665 114.4,164.565 114.4,157.9 115,157.3 v1@118.5,157.3 ; 117.783,157.3 ccw(c117.783,158.086) v1@118.339,157.53 ; 118.042,157.3 cw(c118.042,156.879) v1@118.339,157.176
  other v1: 118.516,157.353
DVI_DATA9: P12.13 RR11.2 U7.52 | length 22.6
  Top Layer w0.2: RR11.2@116.95,157 116.95,157.19 117.385,157.625 ; RR11.2@116.956,157.012 cw(c117.344,157.035) 117.069,157.31 ; RR11.2@117.156,157.024 cw(c117.94,157.069) 117.385,157.625 ; 118.6,158.659 cw(c118.845,158.659) U7.52@118.672,158.832 ; U7.52@118.654,159.5 118.6,159.446 118.6,158.39 117.834,157.625 117.385,157.625
  Top Layer w0.21: v1@116.651,155.974 ccw(c116.17,156.718) RR11.2@117.056,156.718 117.056,156.056 ; v1@116.765,155.797 ccw(c116.419,156.332) RR11.2@117.056,156.332 ; RR11.2@116.989,156.351 cw(c116.827,156.189) 117.056,156.189 cw(c117.285,156.189) RR11.2@117.123,156.351
  Power_Plane w0.21: P12.13@108.769,162.299 cw(c108.789,161.669) 109.235,162.115 ; P12.13@108.776,162.089 cw(c108.811,161.005) 109.578,161.772 ; P12.13@108.85,162.5 109.578,161.772 ; P12.13@109.158,162.484 ccw(c109.863,162.484) 109.364,161.986 ; v1@116.611,155.941 ccw(c116.153,156.399) 116.8,156.399 ; v1(116.784,155.768) v1(116.784,155.768) ; v1@116.8,155.75 116.8,158.2 114.55,160.45 110.3,160.45 109.578,161.172 109.578,161.772 ; 116.8,156.32 ccw(c117.336,156.32) v1@116.957,155.941
DVI_DATA10: P11.10 RR11.3 U7.51 | length 38.5
  Top Layer w0.2: RR11.3@116.256,156.972 116.256,157.211 117.07,158.025 117.669,158.025 118.15,158.506 118.15,159.496 U7.51@118.154,159.5 ; RR11.3@116.356,157.018 cw(c117.062,157.018) 116.563,157.517
  Top Layer w0.21: v1@101.275,153.325 cw(c101.975,152.625) 101.975,153.615 ; v1@101.295,153.305 v1(101.25,153.35) 101.515,153.615 ; v1@101.339,153.578 ccw(c101.399,153.731) 101.515,153.615 ; v1@101.423,153.176 cw(c102.482,152.118) 102.482,153.615 ; v1@101.478,153.439 cw(c101.631,153.499) 101.515,153.615 ; 116.072,156.202 ccw(c115.856,156.418) RR11.3@116.161,156.418 ; RR11.3@116.256,156.718 116.3,156.674 116.3,156.431 115.782,155.913 115.451,155.913 114.95,155.412 114.95,152.1 113.7,150.85 109.902,150.85 109.716,150.665 109.059,150.665 109.044,150.65 108.445,150.65 107.592,151.503 107.277,151.503 107.27,151.51 107.2,151.51 106.54,151.51 105.565,152.485 105.565,152.991 104.941,153.615 101.515,153.615
  Bottom Layer w0.21: v1@101.077,153.523 ccw(c100.24,154.359) 101.423,154.359 ; v1@101.225,153.374 ccw(c100.747,153.852) 101.423,153.852 ; v1@101.423,153.35 101.423,158.319 P11.10@103.004,159.9 ; P11.10@102.653,159.944 cw(c101.699,159.944) 102.374,159.27 cw(c103.048,158.595) P11.10@103.048,159.549 ; P11.10@103.048,159.944 P11.10@103.004,159.9 ; P11.10@103.05,159.9 P11.10@103.004,159.9
DVI_DATA11: P11.16 RR11.4 U7.50 | length 37.7
  Top Layer w0.2: P11.16@102.648,163.754 cw(c101.682,163.754) 102.365,163.071 cw(c103.048,162.388) P11.16@103.048,163.354 ; P11.16@103.048,163.754 100.6,161.306 100.6,158.9 102.248,157.252 102.248,154.533 102.761,154.02 105.153,154.02 105.97,153.203 105.97,152.73 106.785,151.915 107.753,151.915 108.583,151.085 109.564,151.085 109.759,151.28 110.457,151.28 110.482,151.255 113.484,151.255 114.545,152.316 114.545,155.807 RR11.4@115.456,156.718 ; 114.773,156.035 cw(c115.456,155.352) RR11.4@115.456,156.318 ; 115.115,156.377 cw(c115.456,156.035) RR11.4@115.456,156.518 ; RR11.4@115.356,157.018 cw(c115.689,157.018) 115.454,157.254 ; RR11.4@115.4,157 115.4,157.2 116.625,158.425 117.503,158.425 117.654,158.576 U7.50@117.654,159.5 ; RR11.4@115.556,157.018 cw(c116.372,157.018) 115.795,157.595
DVI_DATA12: P11.9 RR12.1 U7.47 | length 31.4
  Top Layer w0.21: P11.9@104.318,159.549 cw(c104.318,158.262) 105.228,159.172 ; P11.9@104.318,159.759 cw(c104.318,158.979) 104.869,159.531 ; P11.9@104.35,160.05 105.868,158.532 105.868,153.878 106.375,153.371 106.375,152.945 107,152.32 107.92,152.32 108.75,151.49 108.806,151.49 109.396,151.49 109.596,151.69 113.24,151.69 113.285,151.735 113.391,151.735 114.015,152.359 114.015,152.465 114.14,152.59 114.14,155.735 114.03,155.845 113.929,155.845 113.157,156.617 RR12.1@113.157,156.718 ; P11.9@104.713,159.944 ccw(c105.333,159.944) 104.895,159.505 ; RR12.1@113.09,157.085 ccw(c112.945,157.23) 113.15,157.23 ; RR12.1@113.15,156.718 113.15,160.527 114.473,161.85 U7.47@115.35,161.85 ; 113.15,157.264 ccw(c113.403,157.264) RR12.1@113.224,157.085 ; RR12.1@113.157,156.323 cw(c113.157,155.614) 113.658,156.115 ; 114.31,161.688 cw(c114.654,161.344) U7.47@114.654,161.83
DVI_DATA13: P12.10 RR12.2 U7.46 | length 31.2
  Top Layer w0.21: 106.564,159.164 cw(c107.493,158.236) P12.10@107.493,159.549 ; 106.923,159.523 cw(c107.493,158.953) P12.10@107.493,159.759 ; 106.924,159.524 ccw(c106.504,159.944) P12.10@107.098,159.944 ; P12.10@107.45,160.05 106.278,158.878 106.278,154.047 106.785,153.54 106.785,153.115 107.17,152.73 108.09,152.73 108.92,151.9 108.975,151.9 109.226,151.9 109.426,152.1 113.05,152.1 113.095,152.145 113.221,152.145 113.605,152.529 113.605,152.655 113.73,152.78 113.73,155.276 113.306,155.7 112.85,155.7 112.357,156.193 ; RR12.2@112.291,156.35 cw(c112.138,156.193) 112.357,156.193 ; 112.3,157.385 ccw(c112.724,157.385) RR12.2@112.424,157.085 ; RR12.2@112.35,156.65 112.3,156.7 112.3,160.257 114.393,162.35 U7.46@115.304,162.35 ; RR12.2@112.357,156.718 112.357,156.193 ; RR12.2@112.423,156.35 ccw(c112.576,156.193) 112.357,156.193 ; RR12.2@112.452,156.418 ccw(c113.225,156.418) 112.678,155.872
DVI_DATA14: P11.12 RR12.3 U7.45 | length 36.9
  Top Layer w0.21: v1(108.45,153.35) 108.505,153.405 109.755,153.405 110.252,153.902 110.252,155.344 110.608,155.7 111.2,155.7 111.557,156.057 RR12.3@111.557,156.718 111.55,156.725 111.55,157.414 111.725,157.589 111.725,158.811 111.7,158.835 111.7,160.25 112,160.55 ; RR12.3@111.49,156.351 cw(c111.328,156.189) 111.557,156.189 cw(c111.786,156.189) RR12.3@111.624,156.351 ; RR12.3@111.49,157.085 ccw(c111.345,157.23) 111.55,157.23 ; 111.55,157.264 ccw(c111.803,157.264) RR12.3@111.624,157.085 ; 111.95,160.487 114.268,162.805 115.259,162.805 U7.45@115.304,162.85 ; 114.496,162.805 ccw(c114.496,163.008) U7.45@114.64,162.864
  Bottom Layer w0.21: 101.93,160.356 cw(c103.048,159.237) P11.12@103.048,160.819 ; 102.288,160.714 cw(c103.048,159.954) P11.12@103.048,161.029 ; 102.558,160.984 ccw(c102.328,161.214) P11.12@102.653,161.214 ; P11.12@102.95,161.25 102.824,161.25 101.905,160.331 101.905,160.179 101.521,159.795 101.369,159.795 100.595,159.021 100.595,153.005 100.6,153 100.6,152.6 101.235,151.965 101.893,151.965 103.115,151.965 103.336,151.743 104.671,151.743 104.778,151.85 106.65,151.85 106.95,151.85 v1(108.45,153.35) ; v1@108.205,153.35 cw(c107.614,153.35) 108.032,152.932 cw(c108.45,152.514) v1@108.45,153.105
DVI_DATA15: P12.7 RR12.4 U7.44 | length 19
  Top Layer w0.21: v1@110.633,161.968 cw(c110.633,161.367) 111.058,161.792 ; RR12.4@110.714,157.103 ccw(c110.641,157.244) 110.8,157.244 ; RR12.4@110.8,156.7 110.8,157.244 ; v1@110.82,162.03 111.15,161.7 111.15,158.865 111.14,158.855 111.14,158.816 111.315,158.641 111.315,157.759 110.8,157.244 ; RR12.4@110.852,157.018 cw(c111.523,157.018) 111.048,157.492 ; v1@110.878,162.213 ccw(c111.46,162.213) 111.048,161.802 ; 111.2,160.45 113.965,163.215 114.231,163.215 114.331,163.315 115.269,163.315 U7.44@115.304,163.35 ; 114.52,163.315 ccw(c114.52,163.484) U7.44@114.64,163.364
  Bottom Layer w0.21: P12.7@108.763,158.859 ccw(c108.763,159.453) 109.183,159.033 ; P12.7@108.763,159.069 ccw(c108.763,160.17) 109.541,159.391 ; P12.7@108.85,158.7 110.083,159.933 110.083,160.76 110.368,161.045 110.368,161.948 v1(110.633,162.213) ; P12.7@109.158,158.674 cw(c109.964,158.674) 109.394,159.244
DVI_DATA16: P12.8 RR13.1 U7.43 | length 26.3
  Top Layer w0.21: v1@111.175,162.825 111.5,162.5 112.6,162.5 113.725,163.625 114.061,163.625 114.286,163.85 U7.43@115.304,163.85
  Bottom Layer w0.21: P12.8@107.132,158.834 cw(c106.85,158.958) 106.85,158.65 ; P12.8@107.151,158.476 ccw(c106.85,158.302) 106.85,158.65 ; P12.8@107.55,158.65 106.85,158.65 ; RR13.1@110.998,161.163 110.998,161.498 111.3,161.8 v1@111.3,162.849 ; RR13.1@111.093,161.463 cw(c111.407,161.463) 111.185,161.685 ; v1@111.177,162.626 cw(c110.878,162.328) 111.3,162.328 ; v1@111.177,162.973 ccw(c110.879,163.27) 111.3,163.27 ; 111.3,162.088 cw(c112.061,162.088) v1@111.523,162.626 ; 111.3,163.512 ccw(c112.062,163.512) v1@111.523,162.973 ; v1(111.35,162.8) v1@111.3,162.849 ; 106.85,158.65 106.4,159.1 106.4,166.339 107.16,167.099 109.096,167.099 109.568,166.627 109.568,166.125 110.359,165.335 111.3,164.394 v1@111.3,162.85
DVI_DATA17: P12.5 RR13.2 U7.42 | length 15.9
  Top Layer w0.21: v1(112.2,163.25) 112.2,163.3 112.75,163.3 ; v1@112.373,163.423 ccw(c112.67,163.72) 112.67,163.3 ; v1@112.404,163.114 cw(c112.75,162.885) 112.75,163.3 ; U7.42@115.304,164.35 115.279,164.325 114.181,164.325 113.891,164.035 113.485,164.035 112.75,163.3
  Bottom Layer w0.21: P12.5@108.763,157.404 108.763,157.536 109.568,158.341 109.568,158.444 109.978,158.855 110.082,158.855 110.493,159.266 110.493,159.789 110.904,160.2 111.55,160.2 111.75,160.4 RR13.2@111.75,161.2 ; P12.5@108.763,157.799 ccw(c108.763,158.435) 109.213,157.985 ; P12.5@108.948,157.404 cw(c109.712,157.404) 109.172,157.944 ; P12.5@109.158,157.404 cw(c110.429,157.404) 109.53,158.303 ; RR13.2@111.731,161.53 ccw(c111.564,161.697) 111.8,161.697 ; 111.75,160.518 cw(c112.143,160.518) RR13.2@111.865,160.796 ; RR13.2@111.8,161.15 111.8,162 112.2,162.4 v1(112.2,163.25) 112.2,163.3 v1@112.175,163.275 ; 111.8,161.688 ccw(c112.023,161.688) RR13.2@111.865,161.53 ; RR13.2@111.9,161.1 RR13.2@111.9,161.2 ; v1@112.027,163.076 cw(c111.608,162.658) 112.2,162.658 cw(c112.791,162.658) v1@112.373,163.076
DVI_DATA18: P12.6 RR13.3 U7.41 | length 29.4
  Top Layer w0.21: 106.752,156.702 cw(c107.493,155.961) P12.6@107.493,157.009 ; 106.846,156.796 ccw(c106.239,157.404) P12.6@107.098,157.404 ; 107.111,157.061 cw(c107.493,156.678) P12.6@107.493,157.219 ; P12.6@107.474,157.424 106.688,156.638 106.688,154.531 107.16,154.059 109.389,154.059 109.842,154.512 109.842,155.514 110.25,155.922 110.25,156.09 110.252,156.092 110.252,157.344 110.431,157.523 110.499,157.523 110.905,157.928 110.905,158.471 110.7,158.676 110.7,160.995 110,161.695 ; 109.978,161.717 109.978,162.528 110.385,162.935 110.541,162.935 111.756,164.15 v1(112.55,164.15) ; v1@112.377,163.977 ccw(c111.959,163.559) 111.959,164.15 ccw(c111.959,164.741) v1@112.377,164.323 ; v1@112.56,164.395 ccw(c112.582,164.908) 112.945,164.545 ; v1@112.6,164.15 v1(112.55,164.15) ; v1@112.795,164.16 cw(c113.308,164.182) 112.945,164.545 ; U7.41@115.304,164.85 114.126,164.85 113.721,164.445 113.178,164.445 113.078,164.545 112.945,164.545 ; v1(112.55,164.15) 112.945,164.545
  Bottom Layer w0.21: RR13.3@112.531,161.53 ccw(c112.364,161.697) 112.6,161.697 ; v1(112.55,164.15) 112.9,163.8 112.9,162.5 112.6,162.2 112.6,161.25 RR13.3@112.6,161.1 ; 112.6,161.688 ccw(c112.823,161.688) RR13.3@112.665,161.53
DVI_DATA19: P11.13 RR13.4 U7.40 | length 27.5
  Top Layer w0.21: P11.13@104.318,162.669 ccw(c104.318,163.275) 104.746,162.846 ; P11.13@104.318,162.879 ccw(c104.318,163.992) 105.105,163.205 ; P11.13@104.4,162.5 105.7,163.8 105.7,167.25 v1(106.15,167.7) ; P11.13@104.713,162.484 cw(c105.507,162.484) 104.946,163.046 ; v1@105.905,167.7 cw(c105.313,167.7) 105.732,167.281 cw(c106.15,166.863) v1@106.15,167.455 ; v1@113.5,165.35 U7.40@115.304,165.35
  Bottom Layer w0.21: v1@106.009,167.509 105.974,167.474 105.974,167.524 v1(106.15,167.7) ; v1@106.15,167.509 109.266,167.509 110.145,166.63 110.145,166.128 110.528,165.745 110.555,165.745 111.072,165.228 111.095,165.228 111.478,164.845 112.021,164.845 112.326,165.15 113.45,165.15 v1(113.45,165.1) ; v1@106.175,167.724 ccw(c106.695,168.244) 106.695,167.509 ; v1@106.323,167.873 ccw(c107.202,168.751) 107.202,167.509 ; 112.737,165.15 cw(c112.737,164.387) 113.277,164.926 cw(c112.846,164.496) 113.455,164.496 ; 112.98,165.15 ccw(c112.98,165.57) v1@113.277,165.273 ; RR13.4@113.331,161.53 ccw(c113.031,161.83) 113.455,161.83 ; RR13.4@113.45,161.3 113.455,161.305 v1@113.455,165.15 ; 113.455,164.521 cw(c114.029,164.521) v1@113.623,164.926
DVI_DATA20: P12.3 RR14.1 U7.39 | length 28.2
  Top Layer w0.21: P12.3@108.75,156 108.75,156.25 109.568,157.068 109.568,161.547 109.568,162.151 109.568,162.724 110.189,163.345 110.371,163.345 111.005,163.978 111.005,164.128 111.721,164.845 112.045,164.845 112.795,165.595 113.3,166.1 113.8,166.1 ; P12.3@108.763,156.529 ccw(c108.763,157.171) 109.217,156.717 ; P12.3@108.948,156.134 cw(c109.706,156.134) 109.17,156.67 ; P12.3@109.158,156.134 cw(c110.423,156.134) 109.529,157.029 ; v1@109.697,170.377 cw(c109.403,169.746) 110.1,169.746 ; v1@109.785,170.568 cw(c109.556,170.075) 110.1,170.075 ; v1(109.8,170.6) 109.8,170.7 110.1,171 ; v1@109.8,170.845 ccw(c109.8,171.194) 110.047,170.947 ; v1@109.873,170.758 cw(c109.709,170.403) 110.1,170.403 ; v1@110.03,170.684 cw(c110.313,170.787) 110.1,171 ; U7.39@115.304,165.85 114.05,165.85 113.8,166.1 ; 110.1,171 110.1,169.8 113.8,166.1
  Bottom Layer w0.21: v1(109.8,170.6) 109.8,170.7 110.1,171 ; v1@109.8,170.845 ccw(c109.8,171.194) 110.047,170.947 ; v1@110.03,170.684 cw(c110.313,170.787) 110.1,171 ; RR14.1@110.042,170.547 ccw(c109.88,170.709) 110.109,170.709 ccw(c110.338,170.709) RR14.1@110.176,170.547 ; RR14.1@110.109,170.18 110.109,170.991 110.1,171
DVI_DATA21: P12.4 RR14.2 U7.38 | length 35.3
  Top Layer w0.2: v1@110.723,171.673 cw(c110.296,171.246) 110.9,171.246 cw(c111.504,171.246) v1@111.077,171.673 ; v1(110.9,171.85) 110.9,169.573 114.048,166.425 115.229,166.425 U7.38@115.304,166.35 ; 114.413,166.425 cw(c114.413,166.109) U7.38@114.636,166.332
  Bottom Layer w0.2: P12.4@107.093,156.134 ccw(c106.127,156.134) 106.81,156.817 ccw(c107.493,157.5) P12.4@107.493,156.534 ; P12.4@107.4,156.05 P12.4@107.4,156.073 ; P12.4@107.493,156.134 105.95,157.677 105.95,165.655 105.918,165.687 105.918,166.675 105.935,166.692 105.935,166.939 105.5,167.375 105.5,167.969 105.881,168.35 106.5,168.35 110.25,172.1 110.269,172.1 ; 110.438,171.93 ccw(c110.678,172.17) v1@110.872,171.891 ; v1@110.671,171.75 ccw(c110.519,171.684) 110.519,171.85 ; v1@110.671,171.95 cw(c110.519,172.016) 110.519,171.85 ; v1@110.723,171.673 cw(c110.275,171.225) 110.909,171.225 ; v1@110.758,172.056 cw(c110.54,172.37) 110.269,172.1 ; RR14.2@110.838,170.551 ccw(c110.668,170.721) 110.909,170.721 ccw(c111.15,170.721) RR14.2@110.98,170.551 ; RR14.2@110.9,169.95 RR14.2@110.9,170.18 ; RR14.2@110.909,170.18 110.909,171.841 v1(110.9,171.85) 110.519,171.85 ; 110.909,171.268 cw(c111.482,171.268) v1@111.077,171.673 ; 110.269,172.1 110.519,171.85
DVI_DATA22: P11.14 RR14.3 U7.37 | length 32.8
  Top Layer w0.2: v1(102.55,168) 105.5,170.95 108.55,170.95 108.85,171.25 ; v1@102.55,168.25 ccw(c102.55,168.854) 102.977,168.427 ccw(c103.404,168) v1@102.8,168 ; 108.784,171.203 110.081,172.5 111.169,172.5 111.55,172.119 ; v1@111.523,171.023 cw(c111.096,170.596) 111.7,170.596 cw(c112.304,170.596) v1@111.877,171.023 ; 111.55,171.66 ccw(c112.128,171.66) v1@111.734,171.237 ; v1@111.87,171.383 cw(c112.556,172.119) 111.55,172.119 ; U7.37@115.304,166.85 114.188,166.85 111.7,169.338 v1(111.7,171.2) 111.55,171.35 111.55,172.119
  Bottom Layer w0.2: v1@102.373,167.823 cw(c101.946,167.396) 102.55,167.396 cw(c103.154,167.396) v1@102.727,167.823 ; 102.458,162.942 cw(c102.001,162.484) P11.14@102.648,162.484 ; 102.546,162.854 ccw(c102.967,163.276) P11.14@103.028,162.683 ; v1(102.55,168) 102.55,166.927 102.248,166.625 102.248,163.152 ; P11.14@102.9,162.5 102.248,163.152 ; P11.14@103.007,162.882 cw(c102.912,163.816) 102.248,163.152 ; v1@111.523,171.023 cw(c111.096,170.596) 111.7,170.596 cw(c112.304,170.596) v1@111.877,171.023 ; RR14.3@111.638,170.551 ccw(c111.489,170.7) 111.7,170.7 ; RR14.3@111.7,170.18 v1(111.7,171.2) ; 111.7,170.743 ccw(c111.972,170.743) RR14.3@111.78,170.551
DVI_DATA23: P11.11 RR14.4 U7.36 | length 30.4
  Top Layer w0.2: v1@112.323,171.573 cw(c111.776,171.026) 112.55,171.026 ; v1(112.5,171.75) v1@112.55,171.7 ; 112.55,171.267 cw(c112.983,171.267) v1@112.677,171.573 ; v1@112.55,171.8 v1@112.55,171.7 ; U7.36@115.304,167.35 114.3,167.35 112.55,169.1 v1@112.55,171.7
  Bottom Layer w0.2: P11.11@104.3,161.15 105.55,162.4 105.55,165.489 105.518,165.457 105.518,166.791 105.1,167.209 105.1,168.135 105.715,168.75 106.335,168.75 110.185,172.6 111.584,172.6 112.434,171.75 v1(112.5,171.75) 112.509,171.741 RR14.4@112.509,170.18 ; P11.11@104.318,161.414 ccw(c104.318,162.008) 104.738,161.588 ; P11.11@104.318,161.614 ccw(c104.318,162.691) 105.079,161.929 ; P11.11@104.718,161.214 cw(c105.573,161.214) 104.968,161.818 ; 111.961,172.223 ccw(c112.5,172.762) v1@112.5,172 ; 112.12,172.065 cw(c111.805,171.75) v1@112.25,171.75 ; v1@112.323,171.573 cw(c111.875,171.125) 112.509,171.125 ; RR14.4@112.438,170.551 ccw(c112.268,170.721) 112.509,170.721 ccw(c112.75,170.721) RR14.4@112.58,170.551 ; 112.509,171.168 cw(c113.082,171.168) v1@112.677,171.573 ; RR14.4@112.55,170.15 RR14.4@112.55,170.18
DVI_DEN: P12.17 RR15.7 U7.2 | length 38.2
  Top Layer w0.2: U7.2@126.504,161.85 127.35,161.85 127.65,161.55 127.65,161.14 127.75,161.04 127.75,159.05 128.65,158.15 128.65,157.166 128.9,156.916 ; U7.2@127.154,161.825 cw(c127.154,161.291) 127.531,161.669 ; RR15.7@128.512,156.366 ccw(c128.085,156.793) 128.689,156.793 ccw(c129.293,156.793) RR15.7@128.866,156.366 ; RR15.7@128.582,156.415 ccw(c128.347,156.916) 128.9,156.916 ; v1@128.6,156.139 cw(c128.964,156.139) RR15.7@128.748,156.432 ; v1@128.6,156.15 v1@128.6,156.284 ; v1@128.6,156.268 cw(c128.754,156.268) RR15.7@128.715,156.416 ; RR15.7@128.61,156.451 cw(c128.511,156.374) v1@128.6,156.284 ; RR15.7@128.618,156.442 cw(c128.448,156.272) 128.689,156.272 cw(c128.93,156.272) RR15.7@128.76,156.442 ; 128.65,157.449 ccw(c129.025,157.449) RR15.7@128.76,157.184 ; v1@128.668,156.234 ccw(c128.495,156.6) 128.9,156.6 ; v1(128.689,156.189) RR15.7@128.689,156.373 ; RR15.7@128.689,156.813 RR15.7@128.689,156.373 ; RR15.7@128.886,156.343 cw(c129.029,156.456) 128.9,156.584 ; v1@128.6,156.284 RR15.7@128.689,156.373 ; RR15.7@128.689,156.373 128.9,156.584 ; 128.9,156.584 128.9,156.916
  Power_Plane w0.2: P12.17@108.763,165.424 ccw(c108.763,166.175) 109.294,165.644 ; P12.17@108.8,165.15 109.3,165.65 ; P12.17@109.152,165.119 cw(c109.697,165.253) 109.3,165.65 ; 128.059,156.2 cw(c128.059,155.559) v1@128.512,156.012 ; 128.112,156.2 ccw(c128.112,156.766) v1@128.512,156.366 ; v1(128.689,156.189) 128.678,156.2 125.5,156.2 121.6,160.1 117.519,160.1 112.819,164.8 110.95,164.8 110.1,165.65 109.3,165.65
DVI_DISABLE: P11.18 P19.62 R34.2 U7.10 | length 116.5
  Top Layer w0.2: 102.267,165.943 cw(c101.348,165.024) P11.18@102.648,165.024 ; 102.602,165.609 ccw(c103.048,166.055) P11.18@103.048,165.424 ; 102.609,165.602 cw(c102.03,165.024) P11.18@102.848,165.024 ; P11.18@103.048,165.024 103.048,165.163 101.9,166.311 101.9,168.522 107,173.622 107,178.027 106.995,178.032 106.995,178.368 109.282,180.655 122.06,180.655 124.115,178.6 130.3,178.6 133.8,175.1 133.8,168.331 132.4,166.931 132.4,166.9 ; U7.10@126.504,165.85 128.144,165.85 128.444,165.55 130.55,165.55 131.3,166.3 R34.2@131.3,166.35 ; 130.755,165.755 ccw(c130.12,166.39) R34.2@131.018,166.39 ; 130.929,165.929 cw(c131.318,165.54) R34.2@131.318,166.09 ; R34.2@131.318,166.39 131.478,166.55 132.05,166.55 ; R34.2@131.408,166.347 cw(c131.732,166.191) 131.732,166.55 ; R34.2@131.588,166.26 cw(c132.05,166.038) 132.05,166.55 ; P19.62@134.8,139.3 136.2,139.3 137.9,141 137.9,147.269 ; P19.62@135.656,139.194 cw(c135.912,138.938) 135.912,139.3 cw(c135.912,139.662) P19.62@135.656,139.406 ; v1(137.465,147.619) 137.465,147.634 137.5,147.669 137.9,147.269 ; v1@137.523,147.375 cw(c137.616,146.985) 137.9,147.269 ; v1@137.715,147.619 ccw(c138.113,147.619) 137.832,147.337 ; v1(144.25,160.75) 144.9,161.4 144.9,165.3 143.6,166.6 141.3,166.6 139.5,164.8 134.5,164.8 132.4,166.9 ; v1@144.25,161 ccw(c144.25,161.604) 144.677,161.177 ccw(c145.104,160.75) v1@144.5,160.75 ; 132.05,166.55 132.4,166.9
  Bottom Layer w0.2: v1(137.465,147.619) 137.45,147.604 138.453,147.604 144.25,153.401 v1(144.25,160.75) ; v1@137.642,147.442 cw(c138.032,147.051) 138.032,147.604 ; v1@137.642,147.795 ccw(c138.105,148.258) 138.105,147.604 ; v1@144.073,160.573 cw(c143.646,160.146) 144.25,160.146 cw(c144.854,160.146) v1@144.427,160.573
DVI_DSEL: R33.2 U7.14 | length 6.9
  Top Layer w0.21: U7.14@126.504,167.85 127.7,167.85 v1@128.35,168.5 ; 127.846,167.996 ccw(c127.343,168.5) v1@128.055,168.5 ; 127.967,168.117 cw(c128.3,167.784) v1@128.3,168.255
  Bottom Layer w0.21: R33.2@126.7,167.92 R33.2@126.77,167.85 ; R33.2@126.75,168.05 127.85,168.05 v1(128.3,168.5) ; R33.2@126.935,167.812 cw(c127.508,167.239) 127.508,168.05 ; R33.2@126.935,168.23 ccw(c127.368,168.663) 127.368,168.05 ; v1@128.055,168.5 cw(c127.463,168.5) 127.882,168.081 cw(c128.3,167.663) v1@128.3,168.255
DVI_DVDD: C56.1 C57.1 C58.1 L8.2 U7.1 U7.12 U7.33 | length 56.4
  Top Layer w0.2: U7.33@115.304,168.85 v1(115.954,169.5) ; v1@115.704,169.5 cw(c115.1,169.5) 115.527,169.073 cw(c115.954,168.646) v1@115.954,169.25 ; U7.12@126.504,166.85 128.65,166.85 v10@128.9,166.6 ; 126.63,161.224 ccw(c127.05,161.644) v10@127.05,161.05 ; v10@126.75,160.752 ccw(c125.91,160.756) U7.1@126.504,161.35 v10@127.05,160.804
  Bottom Layer w0.2: C57.1@115.759,169.141 ccw(c115.421,169.549) v1@115.951,169.549 ; v1@115.779,169.322 cw(c115.373,168.91) C57.1@115.951,168.91 ; v1@115.95,169.55 v1@115.951,169.549 ; v1(115.954,169.5) 117.95,171.496 117.95,172.29 118.36,172.7 118.36,172.71 120.1,174.45 122.746,174.45 123.657,174.45 129,169.107 129,167.35 L8.2@128.85,167.2 ; v1@115.954,169.75 ccw(c115.954,170.354) 116.381,169.927 ccw(c116.808,169.5) v1@116.204,169.5 ; v1@116.126,169.319 ccw(c116.515,168.91) C57.1@115.951,168.91 ; C57.1@116.143,169.141 cw(c116.481,169.549) v1@115.951,169.549 ; 126.126,161.974 ccw(c126.746,162.593) C56.1@126.746,161.717 ; 126.214,166.064 ccw(c125.654,166.624) C58.1@126.446,166.624 ; 126.278,161.822 cw(c125.874,161.417) C56.1@126.446,161.417 ; 126.282,166.132 cw(c126.746,165.667) C58.1@126.746,166.324 ; C56.1@126.689,161.123 cw(c126.603,160.684) v10@127.05,160.684 ; C56.1@126.7,161.371 C56.1@126.715,161.386 ; C56.1@126.727,161.319 cw(c126.651,160.927) v10@127.05,160.927 ; C56.1@126.746,161.054 C56.1@126.746,161.354 ; C58.1@126.75,166.6 125.9,165.75 125.9,162.2 C56.1@126.714,161.386 ; C58.1@126.75,166.65 126.85,166.75 128.85,166.75 L8.2@128.85,167.2 ; v10@126.796,160.91 ccw(c126.493,161.1) C56.1@126.746,161.354 ; C58.1@126.817,166.553 cw(c127.292,166.078) 127.292,166.75 ; C58.1@126.828,166.567 cw(c127.235,166.284) 127.147,166.772 ; C58.1@126.85,166.775 C58.1@126.925,166.85 ; C58.1@126.917,166.87 ccw(c127.185,167.257) 127.269,166.794 ; C56.1@126.923,161.177 cw(c126.71,160.964) v10@126.965,160.803 ; C58.1@126.958,166.412 cw(c127.774,165.596) 127.774,166.75 ; C58.1@126.958,166.836 ccw(c127.166,167.044) 127.166,166.75 ; C58.1@126.992,166.453 cw(c127.796,165.895) 127.622,166.858 ; C58.1@127.025,166.75 ccw(c127.025,168.778) 128.459,167.344 ccw(c127.153,168.65) 129,168.65 ; v10(127.05,160.75) 127.05,161.05 C56.1@126.746,161.354 ; 127.507,166.75 ccw(c127.507,168.296) 128.6,167.203 ccw(c127.636,168.167) 129,168.167 ; 127.933,166.75 cw(c127.933,165.683) v10@128.688,166.438 ; 127.99,166.75 ccw(c127.99,167.813) 128.742,167.061 ccw(c128.119,167.684) 129,167.684 ; L8.2@128.416,166.75 cw(c128.416,166.166) v10@128.829,166.579 ; L8.2@128.418,166.75 ccw(c128.418,167.132) L8.2@128.688,166.862 ; L8.2@128.473,166.75 ccw(c128.473,167.33) L8.2@128.883,166.92 ; L8.2@128.703,166.876 ccw(c128.42,167.2) L8.2@128.85,167.2 ; L8.2@129.027,166.921 cw(c129.158,167.2) L8.2@128.85,167.2 ; C57.1@115.951,168.91 v1@115.951,169.549 ; C56.1@126.715,161.386 C56.1@126.746,161.417 C56.1@126.746,161.354 ; C56.1@126.715,161.386 C56.1@126.746,161.354
  other v10: 128.9,166.65